# EAGLE board MCP23017_O_v1_0 (EAGLE 9.6.2)
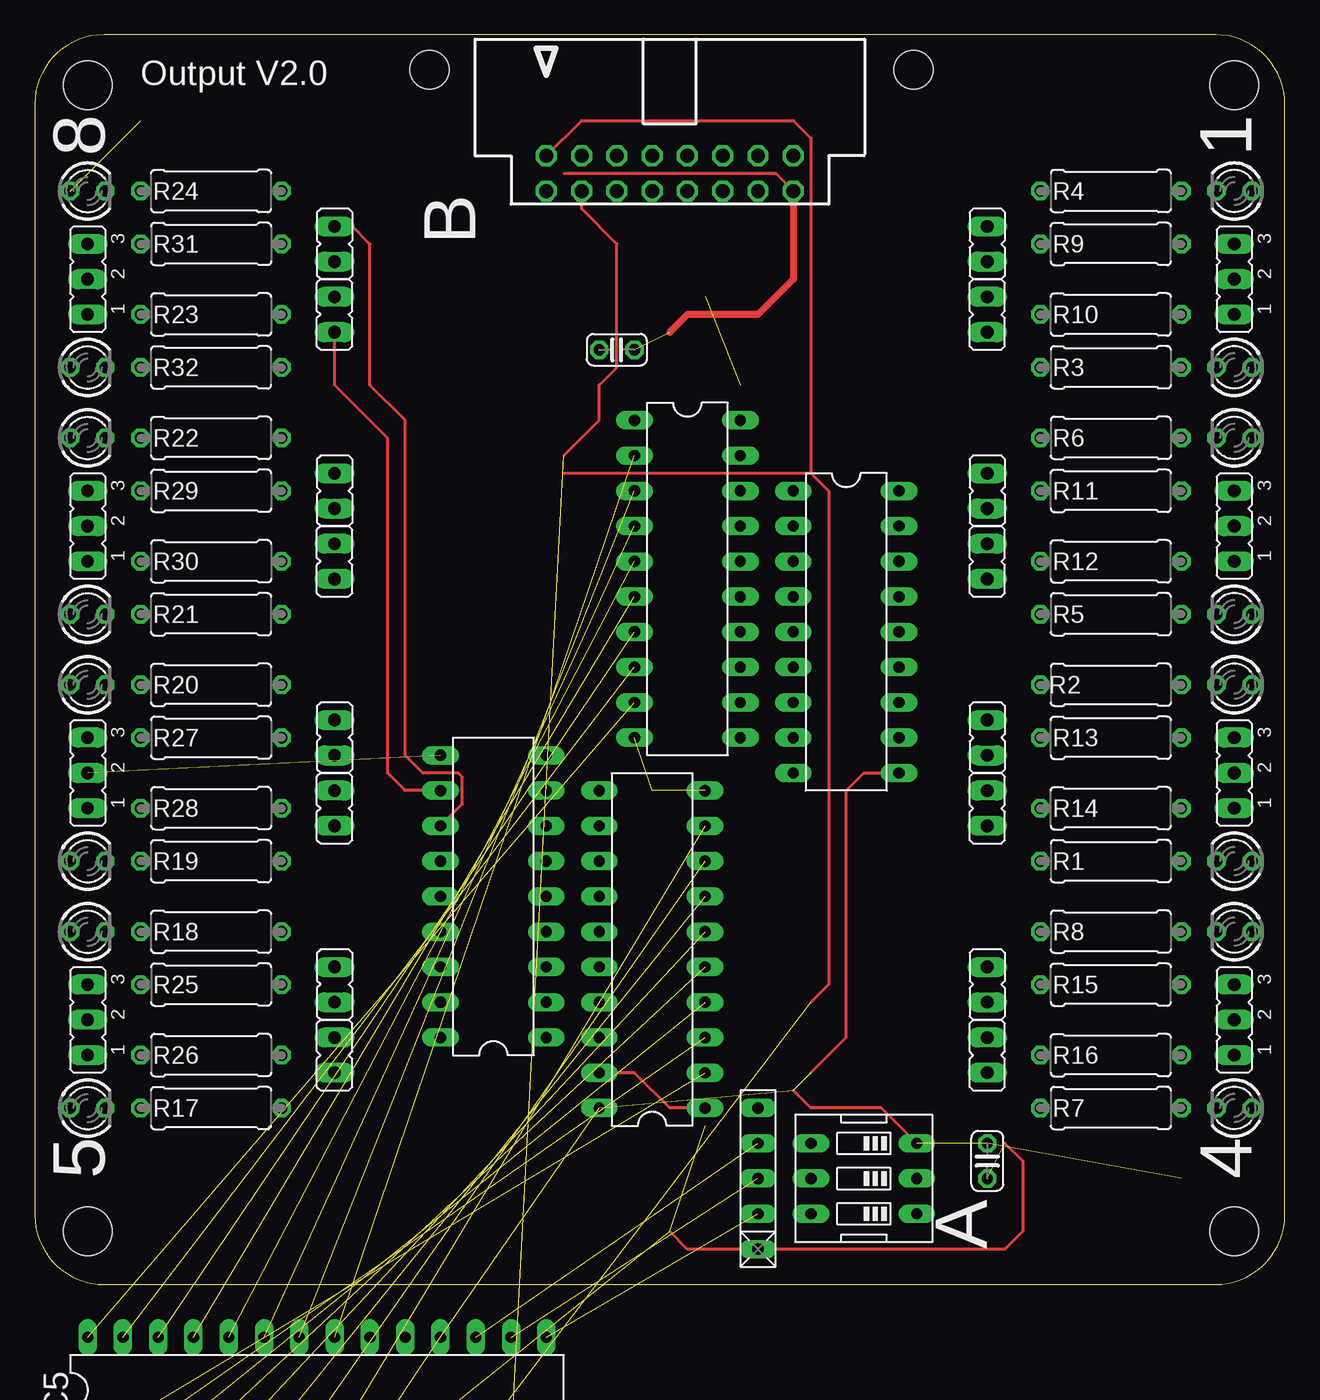
[diagram p0: board, top side]
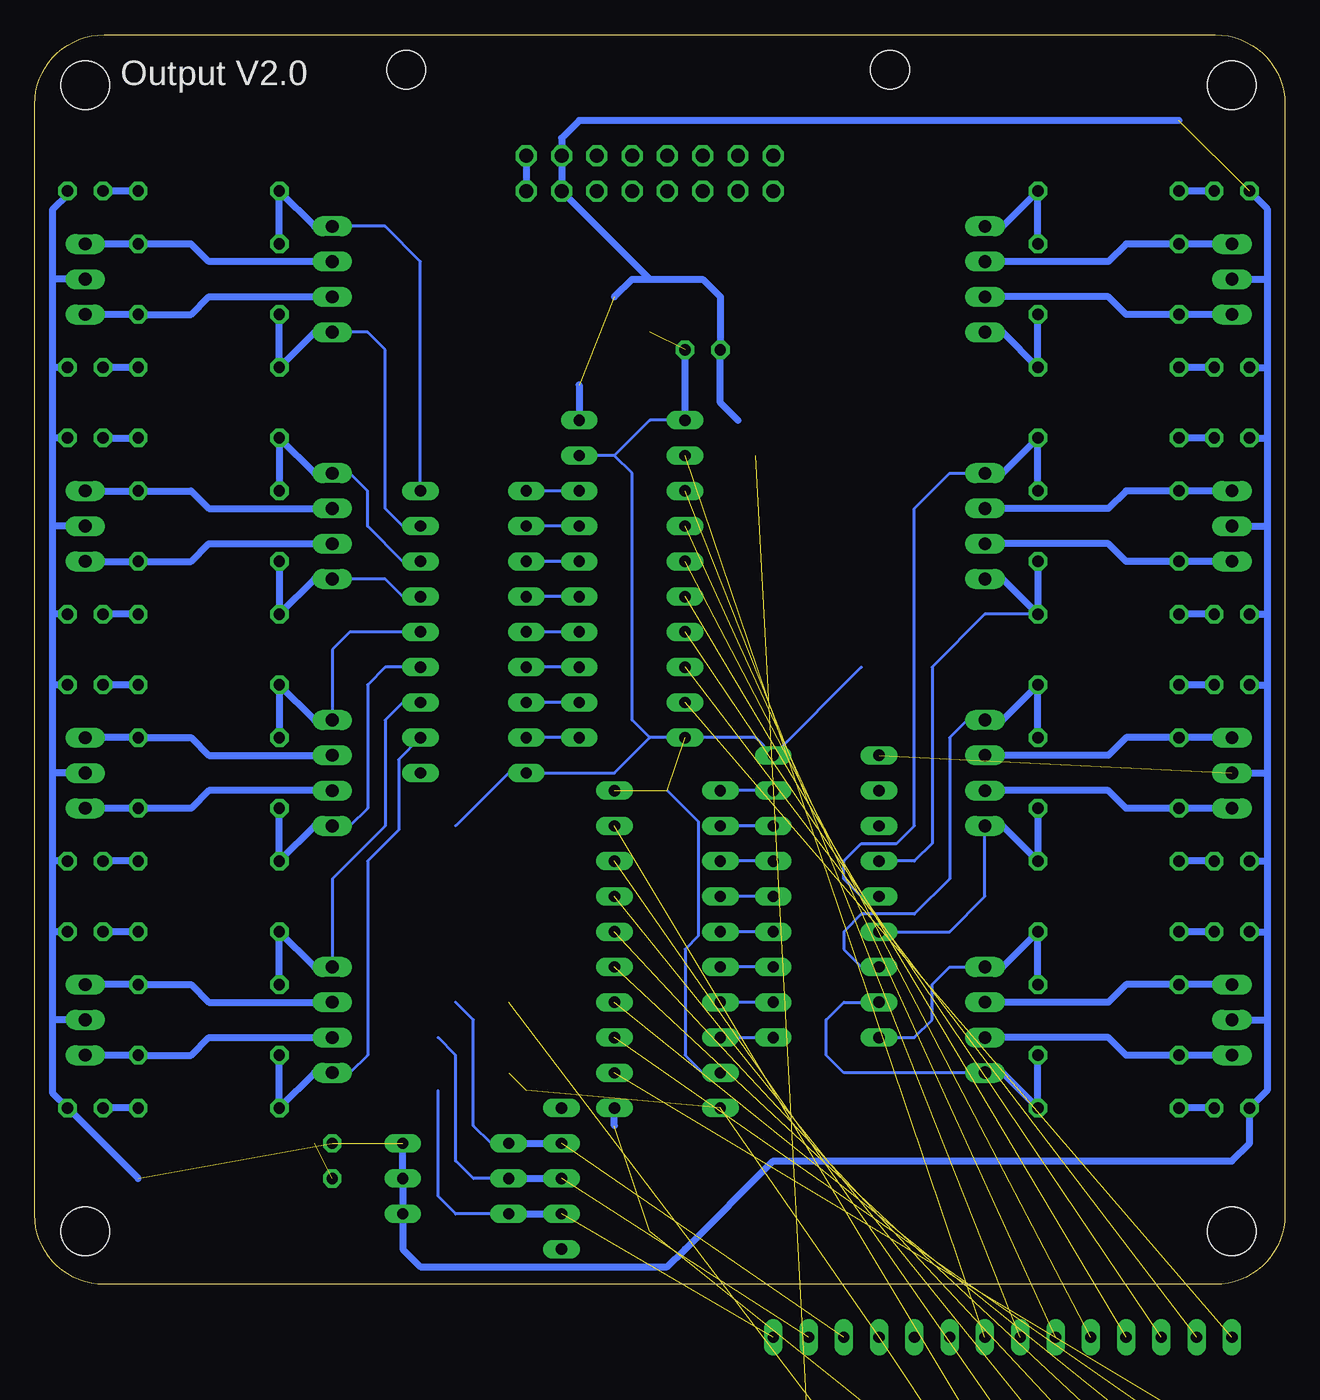
[diagram p1: board, bottom side, seen from below]

Size 90 x 90 mm. Coordinates in mm from the lower left corner, seen from the top.
Outline: 0,85 0,5 arc90 5,0 85,0 arc90 90,5 90,85 arc90 85,90 5,90 arc90 0,85
Copper layers (1*16): Top 0.035mm / dielectric 1.5mm / Bottom 0.035mm
Design rules "default": minimum track width 6mil, minimum drill 0.35mm, track to track 6mil, track to pad 6mil, pad to pad 6mil, via to via 6mil, smd to smd 6mil, copper to edge 40mil, drill to drill 6mil, minimum pad ring 10mil, minimum via ring 8mil, stop-mask expansion 4mil, vias tented up to drill 0mil, thermal gap 10mil
Holes 3.5 mm at 86.36,86.36 3.81,86.36 3.81,3.81 86.36,3.81

## Footprints (pad centres in the part's own frame; a part is rotated, then mirrored left to right if it is on the bottom)
C025-024X044 = drill 0.813 octagon: 1 -1.27,0; 2 1.27,0
DIL18 = drill 0.813 long: 1 -10.16,-3.81; 2 -7.62,-3.81; 3 -5.08,-3.81; 4 -2.54,-3.81; 5 0,-3.81; 6 2.54,-3.81; 7 5.08,-3.81; 8 7.62,-3.81; 9 10.16,-3.81; 10 10.16,3.81; 11 7.62,3.81; 12 5.08,3.81; 13 2.54,3.81; 14 0,3.81; 15 -2.54,3.81; 16 -5.08,3.81; 17 -7.62,3.81; 18 -10.16,3.81
DIL20 = drill 0.813 long: 1 -11.43,-3.81; 2 -8.89,-3.81; 3 -6.35,-3.81; 4 -3.81,-3.81; 5 -1.27,-3.81; 6 1.27,-3.81; 7 3.81,-3.81; 8 6.35,-3.81; 9 8.89,-3.81; 10 11.43,-3.81; 11 11.43,3.81; 12 8.89,3.81; 13 6.35,3.81; 14 3.81,3.81; 15 1.27,3.81; 16 -1.27,3.81; 17 -3.81,3.81; 18 -6.35,3.81; 19 -8.89,3.81; 20 -11.43,3.81
DIL28-3 = drill 0.813 long: 1 -16.51,-3.81; 2 -13.97,-3.81; 3 -11.43,-3.81; 4 -8.89,-3.81; 5 -6.35,-3.81; 6 -3.81,-3.81; 7 -1.27,-3.81; 8 1.27,-3.81; 9 3.81,-3.81; 10 6.35,-3.81; 11 8.89,-3.81; 12 11.43,-3.81; 13 13.97,-3.81; 14 16.51,-3.81; 15 16.51,3.81; 16 13.97,3.81; 17 11.43,3.81; 18 8.89,3.81; 19 6.35,3.81; 20 3.81,3.81; 21 1.27,3.81; 22 -1.27,3.81; 23 -3.81,3.81; 24 -6.35,3.81; 25 -8.89,3.81; 26 -11.43,3.81; 27 -13.97,3.81; 28 -16.51,3.81
JP2 = drill 0.914 long: 1 -2.54,0; 2 0,0; 3 2.54,0
JP1 = drill 0.914 long: 1 0,-1.27; 2 0,1.27
0309/10 = drill 0.813 octagon: 1 -5.08,0; 2 5.08,0
RN-5 = drill 0.813 long: 1 -5.08,0; 2 -2.54,0; 3 0,0; 4 2.54,0; 5 5.08,0
LED3MM = drill 0.813 octagon: A -1.27,0; K 1.27,0
EDG-03 = drill 0.813 long: 1 -2.54,-3.81; 2 0,-3.81; 3 2.54,-3.81; 4 2.54,3.81; 5 0,3.81; 6 -2.54,3.81
057-016-0 = drill 1 octagon: 1 -8.89,-5.08; 2 -8.89,-2.54; 3 -6.35,-5.08; 4 -6.35,-2.54; 5 -3.81,-5.08; 6 -3.81,-2.54; 7 -1.27,-5.08; 8 -1.27,-2.54; 9 1.27,-5.08; 10 1.27,-2.54; 11 3.81,-5.08; 12 3.81,-2.54; 13 6.35,-5.08; 14 6.35,-2.54; 15 8.89,-5.08; 16 8.89,-2.54 | hole 2.8: -17.29,3.66; 17.54,3.66

## Placement (x,y rotation side)
C2  100nF  [C025-024X044]  68.58,8.89 270 top
C3  100nF  [C025-024X044]  2.54,-27.94 0 top  (outside the outline)
C6  100nF  [C025-024X044]  41.91,67.31 180 top
IC1  [DIL18]  33.02,27.94 90 top
IC2  [DIL18]  58.42,46.99 270 top
IC3  74HC540N  [DIL20]  46.99,50.8 270 top
IC4  74HC540N  [DIL20]  44.45,24.13 90 top
IC5  MCP23017SP  [DIL28-3]  20.32,-7.62 0 top  (outside the outline)
JP1  [JP2]  86.36,72.39 90 top
JP2  [JP2]  3.81,19.05 90 top
JP3  [JP2]  86.36,54.61 90 top
JP4  [JP2]  3.81,36.83 90 top
JP5  [JP2]  86.36,36.83 90 top
JP6  [JP2]  3.81,54.61 90 top
JP7  [JP2]  86.36,19.05 90 top
JP8  [JP2]  3.81,72.39 90 top
JP9  [JP1]  68.58,74.93 0 top
JP10  [JP1]  68.58,57.15 0 top
JP11  [JP1]  68.58,52.07 180 top
JP12  [JP1]  68.58,39.37 0 top
JP13  [JP1]  68.58,34.29 180 top
JP14  [JP1]  68.58,21.59 0 top
JP15  [JP1]  68.58,16.51 180 top
JP16  [JP1]  68.58,69.85 180 top
JP17  [JP1]  21.59,21.59 0 top
JP18  [JP1]  21.59,39.37 0 top
JP19  [JP1]  21.59,34.29 180 top
JP20  [JP1]  21.59,57.15 0 top
JP21  [JP1]  21.59,52.07 180 top
JP22  [JP1]  21.59,74.93 0 top
JP23  [JP1]  21.59,69.85 180 top
JP24  [JP1]  21.59,16.51 180 top
R1  470R  [0309/10]  77.47,30.48 180 top
R2  470R  [0309/10]  77.47,43.18 180 top
R3  470R  [0309/10]  77.47,66.04 180 top
R4  470R  [0309/10]  77.47,78.74 180 top
R5  470R  [0309/10]  77.47,48.26 180 top
R6  470R  [0309/10]  77.47,60.96 180 top
R7  470R  [0309/10]  77.47,12.7 180 top
R8  470R  [0309/10]  77.47,25.4 180 top
R9  470R  [0309/10]  77.47,74.93 0 top
R10  470R  [0309/10]  77.47,69.85 0 top
R11  470R  [0309/10]  77.47,57.15 0 top
R12  470R  [0309/10]  77.47,52.07 0 top
R13  470R  [0309/10]  77.47,39.37 0 top
R14  470R  [0309/10]  77.47,34.29 0 top
R15  470R  [0309/10]  77.47,21.59 0 top
R16  470R  [0309/10]  77.47,16.51 0 top
R17  470R  [0309/10]  12.7,12.7 0 top
R18  470R  [0309/10]  12.7,25.4 0 top
R19  470R  [0309/10]  12.7,30.48 0 top
R20  470R  [0309/10]  12.7,43.18 0 top
R21  470R  [0309/10]  12.7,48.26 0 top
R22  470R  [0309/10]  12.7,60.96 0 top
R23  470R  [0309/10]  12.7,66.04 0 top
R24  470R  [0309/10]  12.7,78.74 0 top
R25  470R  [0309/10]  12.7,21.59 180 top
R26  470R  [0309/10]  12.7,16.51 180 top
R27  470R  [0309/10]  12.7,39.37 180 top
R28  470R  [0309/10]  12.7,34.29 180 top
R29  470R  [0309/10]  12.7,57.15 180 top
R30  470R  [0309/10]  12.7,52.07 180 top
R31  470R  [0309/10]  12.7,74.93 180 top
R32  470R  [0309/10]  12.7,69.85 180 top
RN2  [RN-5]  52.07,7.62 90 top
SIG_1  [LED3MM]  86.36,78.74 180 top
SIG_2  [LED3MM]  86.36,66.04 180 top
SIG_3  [LED3MM]  86.36,60.96 180 top
SIG_4  [LED3MM]  86.36,48.26 180 top
SIG_5  [LED3MM]  86.36,43.18 180 top
SIG_6  [LED3MM]  86.36,30.48 180 top
SIG_7  [LED3MM]  86.36,25.4 180 top
SIG_8  [LED3MM]  86.36,12.7 180 top
SIG_9  [LED3MM]  3.81,12.7 0 top
SIG_10  [LED3MM]  3.81,25.4 0 top
SIG_11  [LED3MM]  3.81,30.48 0 top
SIG_12  [LED3MM]  3.81,43.18 0 top
SIG_13  [LED3MM]  3.81,48.26 0 top
SIG_14  [LED3MM]  3.81,60.96 0 top
SIG_15  [LED3MM]  3.81,66.04 0 top
SIG_16  [LED3MM]  3.81,78.74 0 top
SW1  [EDG-03]  59.69,7.62 90 top
X4  057-016-0  [057-016-0]  45.72,83.82 0 top

## Library data of the parts
C2 C3 C6 R1-R32 = resistor
IC1 IC2 = uln-udn
IC3 IC4 = 74xx-eu
IC5 = microchip-6
JP1-JP24 = jumper
RN2 = resistor-net; OC_FARNELL: unknown; OC_NEWARK: unknown
SIG_1-SIG_16 = led
SW1 = special
X4 = con-panduit; OC_FARNELL: unknown; OC_NEWARK: unknown

## Nets
GND2: C2.2 C3.1 C6.1 IC1.9 IC2.9 IC3.1 IC3.10 IC3.19 IC4.1 IC4.10 IC4.19 IC5.10 RN2.1 X4.15 X4.16
N$1: JP1.3 JP9.1 R9.2
N$2: IC2.13 JP13.2 R1.2 R14.1
N$3: R2.1 SIG_5.K
N$4: R1.1 SIG_6.K
N$5: IC2.12 JP14.2 R8.2 R15.1
N$6: IC5.17 RN2.4 SW1.4
N$7: R8.1 SIG_7.K
N$8: R7.1 SIG_8.K
N$9: JP1.1 JP16.1 R10.2
N$10: JP3.3 JP10.1 R11.2
N$11: JP3.1 JP11.1 R12.2
N$12: IC2.8 IC3.11
N$13: JP5.3 JP12.1 R13.2
N$14: IC2.7 IC3.12
N$15: IC2.6 IC3.13
N$16: IC2.5 IC3.14
N$17: IC2.4 IC3.15
N$18: IC2.3 IC3.16
N$19: IC2.2 IC3.17
N$20: IC2.1 IC3.18
N$21: IC3.2 IC5.21
N$22: IC3.3 IC5.22
N$23: IC3.4 IC5.23
N$24: IC3.5 IC5.24
N$25: IC3.6 IC5.25
N$26: IC3.7 IC5.26
N$27: IC3.8 IC5.27
N$28: IC3.9 IC5.28
N$29: IC2.18 JP9.2 R4.2 R9.1
N$30: JP5.1 JP13.1 R14.2
N$31: IC2.17 JP16.2 R3.2 R10.1
N$32: JP7.3 JP14.1 R15.2
N$33: JP7.1 JP15.1 R16.2
N$34: IC1.8 IC4.11
N$35: IC5.16 RN2.3 SW1.5
N$36: R4.1 SIG_1.K
N$37: R3.1 SIG_2.K
N$38: IC2.11 JP15.2 R7.2 R16.1
N$39: IC1.7 IC4.12
N$40: IC1.6 IC4.13
N$41: IC2.16 JP10.2 R6.2 R11.1
N$42: IC2.15 JP11.2 R5.2 R12.1
N$43: IC2.14 JP12.2 R2.2 R13.1
N$44: IC1.5 IC4.14
N$45: IC1.4 IC4.15
N$46: IC1.3 IC4.16
N$47: IC1.2 IC4.17
N$48: IC1.1 IC4.18
N$49: IC4.2 IC5.1
N$50: IC4.3 IC5.2
N$51: IC4.4 IC5.3
N$52: IC4.5 IC5.4
N$53: R6.1 SIG_3.K
N$54: R5.1 SIG_4.K
N$55: IC4.6 IC5.5
N$56: IC4.7 IC5.6
N$57: IC4.8 IC5.7
N$58: IC4.9 IC5.8
N$59: IC1.18 JP17.2 R18.2 R25.1
N$60: IC1.17 JP24.2 R17.2 R26.1
N$61: R18.1 SIG_10.K
N$62: R17.1 SIG_9.K
N$63: IC1.16 JP18.2 R20.2 R27.1
N$64: IC1.15 JP19.2 R19.2 R28.1
N$65: IC1.14 JP20.2 R22.2 R29.1
N$66: R20.1 SIG_12.K
N$67: R19.1 SIG_11.K
N$68: IC1.13 JP21.2 R21.2 R30.1
N$69: R22.1 SIG_14.K
N$70: R21.1 SIG_13.K
N$71: IC1.12 JP22.2 R24.2 R31.1
N$72: R24.1 SIG_16.K
N$73: R23.1 SIG_15.K
N$74: JP2.3 JP17.1 R25.2
N$75: JP2.1 JP24.1 R26.2
N$76: JP4.3 JP18.1 R27.2
N$77: JP4.1 JP19.1 R28.2
N$78: JP6.3 JP20.1 R29.2
N$79: JP6.1 JP21.1 R30.2
N$80: JP8.3 JP22.1 R31.2
N$81: JP8.1 JP23.1 R32.2
N$82: IC5.12 X4.2
N$83: IC1.11 JP23.2 R23.2 R32.1
N$84: IC5.13 X4.3
N$85: IC5.15 RN2.2 SW1.6
VCC5.1: C2.1 C3.2 C6.2 IC1.10 IC2.10 IC3.20 IC4.20 IC5.9 IC5.18 JP1.2 JP2.2 JP3.2 JP4.2 JP5.2 JP6.2 JP7.2 JP8.2 SIG_1.A SIG_2.A SIG_3.A SIG_4.A SIG_5.A SIG_6.A SIG_7.A SIG_8.A SIG_9.A SIG_10.A SIG_11.A SIG_12.A SIG_13.A SIG_14.A SIG_15.A SIG_16.A SW1.1 SW1.2 SW1.3 X4.13 X4.14

## Tracks (layer width: path | path; a pad name or v marks a point on that pad's centre or on a via)
GND2  (7 unrouted)
  Top 0.2: 69.85,10.16 71.12,8.89 71.12,3.81 69.85,2.54 RN2.1 46.99,2.54 45.72,3.81 | IC4.1 45.72,12.7 43.18,15.24 IC4.19 | 38.1,80.01 53.34,80.01 X4.15
  Top 0.508: X4.15 54.61,72.39 52.07,69.85 46.99,69.85 45.72,68.58
  Bottom 0.2: 30.48,44.45 IC1.9 38.1,39.37 IC3.10 45.72,39.37 | 45.72,39.37 48.26,36.83 IC2.9 55.88,36.83 59.69,33.02 | 45.72,39.37 46.99,40.64 46.99,58.42 48.26,59.69 | 48.26,59.69 IC3.19 | IC3.1 45.72,62.23 48.26,59.69 | 44.45,35.56 42.21,33.32 42.21,25.1 43.18,24.13 43.18,16.51 41.91,15.24 IC4.19
  Bottom 0.508: 48.26,11.43 IC4.1 | X4.16 X4.15 | IC3.1 C6.1
N$1
  Bottom 0.508: JP1.3 R9.2 78.74,74.93 77.47,73.66 JP9.1
N$2
  Bottom 0.2: IC2.13 64.77,44.45 66.04,43.18 66.04,34.29 67.31,33.02 JP13.2
  Bottom 0.508: R14.1 R1.2 69.85,33.02 JP13.2
N$3
  Bottom 0.508: R2.1 SIG_5.K
N$4
  Bottom 0.508: R1.1 SIG_6.K
N$5
  Bottom 0.2: IC2.12 63.5,41.91 64.77,40.64 64.77,33.02 68.58,29.21 JP14.2
  Bottom 0.508: R15.1 R8.2 69.85,22.86 JP14.2
N$6  (1 unrouted)
  Bottom 0.2: SW1.4 57.15,10.16 58.42,11.43 58.42,19.05 59.69,20.32
  Bottom 0.508: SW1.4 RN2.4
N$7
  Bottom 0.508: R8.1 SIG_7.K
N$8
  Bottom 0.508: R7.1 SIG_8.K
N$9
  Bottom 0.508: JP1.1 R10.2 78.74,69.85 77.47,71.12 JP16.1
N$10
  Bottom 0.508: JP3.3 R11.2 78.74,57.15 77.47,55.88 JP10.1
N$11
  Bottom 0.508: JP3.1 R12.2 78.74,52.07 77.47,53.34 JP11.1
N$12
  Bottom 0.2: IC3.11 IC2.8
N$13
  Bottom 0.508: JP5.3 R13.2 78.74,39.37 77.47,38.1 JP12.1
N$14
  Bottom 0.2: IC3.12 IC2.7
N$15
  Bottom 0.2: IC3.13 IC2.6
N$16
  Bottom 0.2: IC3.14 IC2.5
N$17
  Bottom 0.2: IC3.15 IC2.4
N$18
  Bottom 0.2: IC3.16 IC2.3
N$19
  Bottom 0.2: IC3.17 IC2.2
N$20
  Bottom 0.2: IC3.18 IC2.1
N$21  (1 unrouted)
N$22  (1 unrouted)
N$23  (1 unrouted)
N$24  (1 unrouted)
N$25  (1 unrouted)
N$26  (1 unrouted)
N$27  (1 unrouted)
N$28  (1 unrouted)
N$29
  Bottom 0.2: IC2.18 62.23,73.66 64.77,76.2 JP9.2
  Bottom 0.508: R9.1 R4.2 69.85,76.2 JP9.2
N$30
  Bottom 0.508: JP5.1 R14.2 78.74,34.29 77.47,35.56 JP13.1
N$31
  Bottom 0.2: IC2.17 63.5,54.61 64.77,55.88 64.77,67.31 66.04,68.58 JP16.2
  Bottom 0.508: R10.1 R3.2 69.85,68.58 JP16.2
N$32
  Bottom 0.508: JP7.3 R15.2 78.74,21.59 77.47,20.32 JP14.1
N$33
  Bottom 0.508: JP7.1 R16.2 78.74,16.51 77.47,17.78 JP15.1
N$34
  Bottom 0.2: IC1.8 IC4.11
N$35  (1 unrouted)
  Bottom 0.2: SW1.5 58.42,7.62 59.69,8.89 59.69,16.51 60.96,17.78
  Bottom 0.508: SW1.5 RN2.3
N$36
  Bottom 0.508: R4.1 SIG_1.K
N$37
  Bottom 0.508: R3.1 SIG_2.K
N$38
  Bottom 0.2: IC2.11 63.8,37.8 63.8,32.72 66.04,30.48 66.04,16.51 67.31,15.24 JP15.2
  Bottom 0.508: R16.1 R7.2 69.85,15.24 JP15.2
N$39
  Bottom 0.2: IC1.7 IC4.12
N$40
  Bottom 0.2: IC1.6 IC4.13
N$41
  Bottom 0.2: IC2.16 63.5,52.07 66.04,54.61 66.04,57.15 67.31,58.42 JP10.2
  Bottom 0.508: R11.1 R6.2 69.85,58.42 JP10.2
N$42
  Bottom 0.2: IC2.15 63.5,49.53 64.77,50.8 JP11.2
  Bottom 0.508: R12.1 R5.2 69.85,50.8 JP11.2
N$43
  Bottom 0.2: IC2.14 67.31,46.99 68.58,45.72 JP12.2
  Bottom 0.508: JP12.2 69.85,40.64 R2.2 R13.1
N$44
  Bottom 0.2: IC1.5 IC4.14
N$45
  Bottom 0.2: IC1.4 IC4.15
N$46
  Bottom 0.2: IC1.3 IC4.16
N$47
  Bottom 0.2: IC1.2 IC4.17
N$48
  Bottom 0.2: IC4.18 IC1.1
N$49  (1 unrouted)
N$50  (1 unrouted)
N$51  (1 unrouted)
N$52  (1 unrouted)
N$53
  Bottom 0.508: SIG_3.K R6.1
N$54
  Bottom 0.508: R5.1 SIG_4.K
N$55  (1 unrouted)
N$56  (1 unrouted)
N$57  (1 unrouted)
N$58  (1 unrouted)
N$59
  Bottom 0.2: IC1.18 26.67,17.78 25.4,19.05 25.4,21.59 24.13,22.86 JP17.2
  Bottom 0.508: R25.1 R18.2 20.32,22.86 JP17.2
N$60
  Bottom 0.2: IC1.17 31.75,20.32 33.02,19.05 33.02,16.51 31.75,15.24 JP24.2
  Bottom 0.508: R26.1 R17.2 20.32,15.24 JP24.2
N$61
  Bottom 0.508: SIG_10.K R18.1
N$62
  Bottom 0.508: SIG_9.K R17.1
N$63
  Bottom 0.2: JP18.2 22.86,40.64 24.13,39.37 24.13,29.21 26.67,26.67 30.48,26.67 31.75,25.4 31.75,24.13 30.48,22.86 IC1.16
  Bottom 0.508: R27.1 R20.2 20.32,40.64 JP18.2
N$64
  Bottom 0.2: IC1.15 24.13,25.4 21.59,27.94 JP19.2
  Bottom 0.508: R28.1 R19.2 20.32,33.02 JP19.2
N$65
  Bottom 0.2: IC1.14 30.48,27.94 31.75,29.21 31.75,30.48 30.48,31.75 27.94,31.75 26.67,33.02 26.67,55.88 24.13,58.42 JP20.2
  Bottom 0.508: R29.1 R22.2 20.32,58.42 JP20.2
N$66
  Bottom 0.508: SIG_12.K R20.1
N$67
  Bottom 0.508: SIG_11.K R19.1
N$68
  Bottom 0.2: R21.2 21.59,48.26 25.4,44.45 25.4,31.75 26.67,30.48 IC1.13
  Bottom 0.508: R30.1 R21.2 20.32,50.8 JP21.2
N$69
  Bottom 0.508: SIG_14.K R22.1
N$70
  Bottom 0.508: SIG_13.K R21.1
N$71
  Top 0.2: IC1.12 30.78,34.59 30.78,36.53 30.48,36.83 27.94,36.83 26.67,38.1 26.67,62.23 24.13,64.77 24.13,74.93 22.86,76.2 JP22.2
  Bottom 0.508: R31.1 R24.2 20.32,76.2 JP22.2
N$72
  Bottom 0.508: SIG_16.K R24.1
N$73
  Bottom 0.508: SIG_15.K R23.1
N$74
  Bottom 0.508: JP2.3 R25.2 11.43,21.59 12.7,20.32 JP17.1
N$75
  Bottom 0.508: JP2.1 R26.2 11.43,16.51 12.7,17.78 JP24.1
N$76
  Bottom 0.508: JP4.3 R27.2 11.43,39.37 12.7,38.1 JP18.1
N$77
  Bottom 0.508: JP4.1 R28.2 11.43,34.29 12.7,35.56 JP19.1
N$78
  Bottom 0.508: JP6.3 R29.2 11.43,57.15 12.7,55.88 JP20.1
N$79
  Bottom 0.508: JP6.1 R30.2 11.43,52.07 12.7,53.34 JP21.1
N$80
  Bottom 0.508: JP8.3 R31.2 11.43,74.93 12.7,73.66 JP22.1
N$81
  Bottom 0.508: JP8.1 R32.2 11.43,69.85 12.7,71.12 JP23.1
N$82  (1 unrouted)
  Top 0.2: 55.88,58.42 57.15,57.15 57.15,21.59 55.88,20.32 | 38.1,58.42 55.88,58.42 | X4.2 39.37,83.82 54.61,83.82 55.88,82.55 55.88,58.42
N$83
  Top 0.2: IC1.11 26.67,35.56 25.4,36.83 25.4,60.96 21.59,64.77 JP23.2
  Bottom 0.508: R32.1 R23.2 20.32,68.58 JP23.2
N$84  (1 unrouted)
  Top 0.2: 38.1,59.69 40.64,62.23 40.64,64.77 41.91,66.04 41.91,74.93 39.37,77.47 X4.3
N$85  (1 unrouted)
  Bottom 0.2: SW1.6 59.69,5.08 60.96,6.35 60.96,13.97
  Bottom 0.508: SW1.6 RN2.2
VCC5.1  (10 unrouted)
  Top 0.2: 55.88,15.24 58.42,17.78 58.42,35.56 59.69,36.83 IC2.10 | SW1.3 60.96,12.7 55.88,12.7 54.61,13.97
  Bottom 0.508: SIG_1.A 87.63,78.49 88.73,77.39 88.73,72.39 | 88.73,72.39 88.73,66.04 | 88.73,66.04 88.73,60.96 | 88.73,60.96 88.73,54.61 | 88.73,54.61 88.73,48.26 | 88.73,48.26 88.73,43.18 | 88.73,43.18 88.73,36.83 | 88.73,36.83 88.73,30.48 | 88.73,30.48 88.73,25.4 | 88.73,25.4 88.73,19.05 | 88.73,19.05 88.73,13.8 SIG_8.A 82.55,7.62 | JP7.2 88.73,19.05 | SIG_7.A 88.73,25.4 | SIG_6.A 88.73,30.48 | JP5.2 88.73,36.83 | SIG_5.A 88.73,43.18 | SIG_4.A 88.73,48.26 | JP3.2 88.73,54.61 | SIG_3.A 88.73,60.96 | SIG_2.A 88.73,66.04 | JP1.2 88.73,72.39 | 7.62,83.82 50.8,83.82 52.07,82.55 X4.14 X4.13 45.72,72.39 | 45.72,72.39 41.91,72.39 40.64,71.12 C6.2 40.64,63.5 39.37,62.23 | 50.8,64.77 IC3.20 | 48.26,71.12 46.99,72.39 45.72,72.39 | SIG_16.A 1.27,77.47 1.27,72.39 | JP8.2 1.27,72.39 | 1.27,72.39 1.27,66.04 | 1.27,66.04 1.27,60.96 | 1.27,60.96 1.27,54.61 | 1.27,54.61 1.27,48.26 | 1.27,48.26 1.27,43.18 | 1.27,43.18 1.27,36.83 | 1.27,36.83 1.27,30.48 | 1.27,30.48 1.27,25.4 | 1.27,25.4 1.27,19.05 | 1.27,19.05 1.27,13.97 SIG_9.A 2.54,10.16 3.81,8.89 36.83,8.89 43.18,2.54 44.45,1.27 62.23,1.27 63.5,2.54 SW1.1 SW1.2 SW1.3 | JP2.2 1.27,19.05 | JP4.2 1.27,36.83 | JP6.2 1.27,54.61 | SIG_15.A 1.27,66.04 | SIG_14.A 1.27,60.96 | SIG_13.A 1.27,48.26 | SIG_12.A 1.27,43.18 | SIG_11.A 1.27,30.48 | SIG_10.A 1.27,25.4

## Text on the board
tNames: Output V2.0 | 8 | 1 | B | 5 | 4 | A
bNames: Output V2.0